# Altium PCB 电眼主板.PcbDoc (part 4 of 5)
Units mm, origin at the board's own origin, x right, y up, seen from the top; angles counter-clockwise.
Board outline 180 x 100 mm, 2 copper layers (Top Layer, Bottom Layer); 210 components, 262 nets, 810 pads, 212 vias.
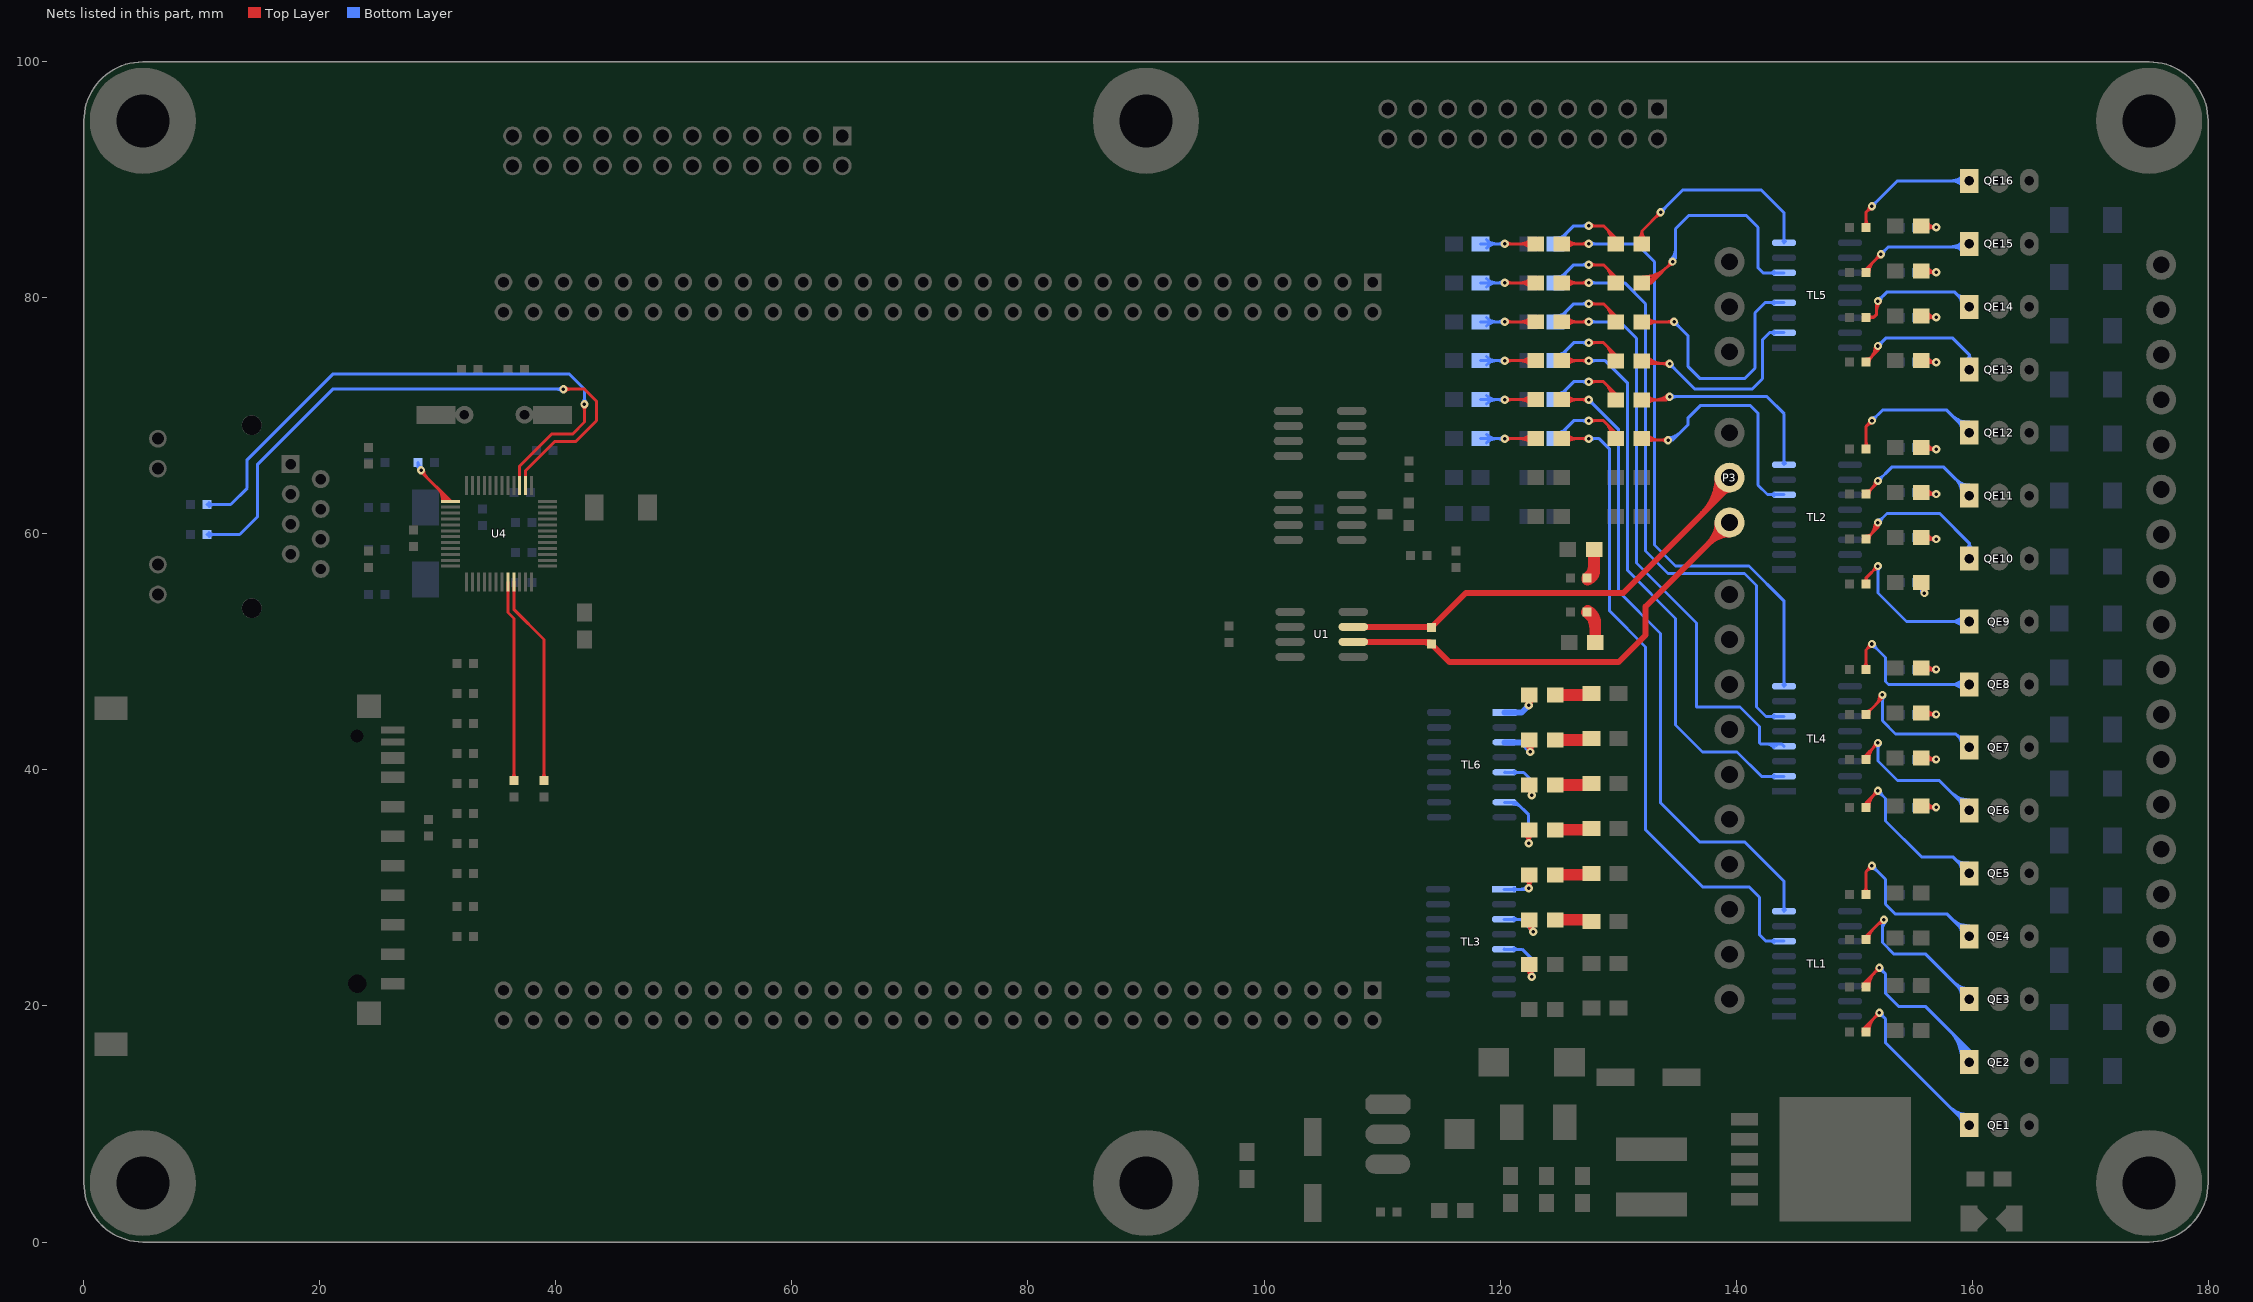
[diagram p4: the nets of this part, all layers, seen from the top]

## Via types
v1: diameter 0.7, hole 0.3, Top Layer to Bottom Layer, 163 vias
v2: diameter 1.4, hole 0.6, Top Layer to Bottom Layer, 49 vias

## Nets (pads, with @x,y where several pads share a name; then routed paths per layer and width w, separated by ;. In a path a pad name is that pad's centre, name@x,y a point inside that pad or via, vN(x,y) a via of type N, cw(c..) or ccw(c..) an arc to the next point about the centre after c; other vN are vias at no path point) (continued)
NetLED10_2: LED10.2 TL3.5 | length 9.1
  Top Layer w0.254: LED10.2@122.256,23.038 cw(c122.083,22.682) v1@122.479,22.682 ; LED10.2@122.479,22.889 ccw(c123.085,22.889) v1@122.66,22.457 ; v1(122.682,22.479) v1@122.479,22.682 ; LED10.2@122.701,23.038 ccw(c122.875,22.682) v1@122.479,22.682 ; v1@122.838,22.638 cw(c123.68,23.495) LED10.2@122.479,23.495 v1@122.479,22.682
  Bottom Layer w0.254: TL3.5@120.377,24.845 TL3.5@120.337,24.805 121.88,24.805 122.682,24.003 v1(122.682,22.479) ; TL3.5@121.181,24.697 cw(c121.442,24.437) 121.442,24.805 cw(c121.442,25.173) TL3.5@121.181,24.913 ; v1@122.524,22.637 ccw(c122.144,23.017) 122.682,23.017 ccw(c123.22,23.017) v1@122.84,22.637
NetLED11_1: LED11.1 TL1.6 | length 59.7
  Top Layer w0.254: LED11.1@125.222,68.072 v1(127.508,68.072) ; LED11.1@125.646,67.713 cw(c126.513,66.846) 126.513,68.072 cw(c126.513,69.298) LED11.1@125.646,68.431 ; v1@127.35,67.914 ccw(c126.97,67.534) 126.97,68.072 ccw(c126.97,68.61) v1@127.35,68.23
  Bottom Layer w0.254: v1(127.508,68.072) 128.397,68.072 129.286,67.183 129.286,53.474 132.334,50.426 132.334,34.925 137.16,30.099 141.097,30.099 141.986,29.21 141.986,26.035 142.534,25.487 TL1.6@144.077,25.487 ; v1@127.666,67.914 cw(c128.046,67.534) 128.046,68.072 cw(c128.046,68.61) v1@127.666,68.23 ; TL1.6@143.233,25.379 ccw(c142.972,25.119) 142.972,25.487 ccw(c142.972,25.855) TL1.6@143.233,25.595
NetLED11_2: LED11.2 RH7.1 | length 10.2
  Top Layer w0.254: v1(120.396,68.072) LED11.2@123.012,68.072 ; v1@120.554,67.914 cw(c120.934,67.534) 120.934,68.072 cw(c120.934,68.61) v1@120.554,68.23 ; LED11.2@122.588,67.713 ccw(c121.721,66.846) 121.721,68.072 ccw(c121.721,69.298) LED11.2@122.588,68.431
  Bottom Layer w0.254: RH7.1@118.364,68.07 v1@120.394,68.07 ; RH7.1@118.85,67.711 cw(c119.717,66.844) 119.717,68.07 cw(c119.717,69.297) RH7.1@118.85,68.43 ; 119.854,68.07 ccw(c119.854,68.614) v1@120.238,68.23 ; 119.862,68.07 cw(c119.862,67.538) v1@120.238,67.914
NetLED12_1: LED12.1 TL2.6 | length 26.3
  Top Layer w0.254: LED12.1@132.021,68.066 132.142,67.945 v1(134.239,67.945) ; LED12.1@132.265,68.246 ccw(c132.992,68.972) 132.992,67.945 ; LED12.1@132.445,67.707 cw(c133.02,67.132) 133.02,67.945 ; LED12.1@132.445,68.425 ccw(c133.605,69.585) 133.605,67.945 ; v1@134.081,67.787 ccw(c133.701,67.407) 133.701,67.945 ccw(c133.701,68.483) v1@134.081,68.103
  Bottom Layer w0.254: v1@134.239,67.914 ccw(c134.239,68.759) 134.836,68.161 ; v1(134.239,67.945) 134.62,67.945 135.946,69.271 135.946,69.85 136.962,70.866 141.224,70.866 141.859,70.231 141.859,64.135 142.661,63.333 TL2.6@144.077,63.333 ; v1@134.239,68.168 ccw(c134.239,69.626) 135.27,68.595 ; TL2.6@143.233,63.225 ccw(c142.972,62.965) 142.972,63.333 ccw(c142.972,63.701) TL2.6@143.233,63.441
NetLED12_2: LED12.2 RH8.1 | length 13.6
  Top Layer w0.254: v1(127.508,69.596) 128.772,69.596 129.811,68.557 LED12.2@129.811,68.066 ; v1@127.666,69.438 cw(c128.046,69.058) 128.046,69.596 cw(c128.046,70.134) v1@127.666,69.754 ; 128.925,69.443 cw(c127.558,68.075) LED12.2@129.492,68.067 ; 129.356,69.012 cw(c128.416,68.072) LED12.2@129.746,68.066
  Bottom Layer w0.254: RH8.1@124.714,68.07 126.24,69.596 v1(127.508,69.596) ; RH8.1@124.841,68.578 ccw(c124.841,69.498) 125.491,68.848 ; RH8.1@125.095,68.07 cw(c126.015,68.07) 125.364,68.721 ; RH8.1@125.349,68.07 cw(c126.882,68.07) 125.798,69.154 ; v1@127.35,69.438 ccw(c126.97,69.058) 126.97,69.596 ccw(c126.97,70.134) v1@127.35,69.754
NetLED13_1: LED13.1 RH9.1 | length 3.7
  Top Layer w1: LED13.1@124.689,27.305 127.633,27.305 RH9.1@127.762,27.176 ; 126.999,27.305 cw(c126.999,26.54) RH9.1@127.54,27.081
NetLED13_2: LED13.2 TL3.3 | length 8.2
  Top Layer w0.254: LED13.2@122.331,26.819 cw(c122.27,26.619) 122.479,26.619 ; LED13.2@122.333,26.843 cw(c122.23,26.616) 122.479,26.616 cw(c122.671,26.616) LED13.2@122.636,26.805 ; LED13.2@122.479,26.838 ccw(c123.164,26.838) v1@122.792,26.263 ; LED13.2@122.627,26.819 ccw(c122.688,26.619) 122.479,26.619 ; v1(122.809,26.289) 122.479,26.619 ; v1@122.93,26.476 cw(c123.465,27.305) LED13.2@122.479,27.305 122.479,26.619
  Bottom Layer w0.254: TL3.3@120.337,27.345 121.753,27.345 v1(122.809,26.289) ; TL3.3@121.181,27.237 cw(c121.442,26.977) 121.442,27.345 cw(c121.442,27.713) TL3.3@121.181,27.453 ; v1@122.586,26.289 ccw(c122.048,26.289) 122.428,26.67 ccw(c122.809,27.05) v1@122.809,26.512
NetLED14_1: LED14.1 TL1.8 | length 58.9
  Top Layer w0.254: LED14.1@125.222,71.374 v1(127.508,71.374) ; LED14.1@125.646,71.015 cw(c126.513,70.148) 126.513,71.374 cw(c126.513,72.6) LED14.1@125.646,71.733 ; v1@127.35,71.216 ccw(c126.97,70.836) 126.97,71.374 ccw(c126.97,71.912) v1@127.35,71.532
  Bottom Layer w0.254: v1@127.508,71.151 cw(c127.508,70.613) 127.889,70.993 cw(c128.269,71.374) v1@127.731,71.374 ; v1(127.508,71.374) 130.048,68.834 130.048,55.118 133.604,51.562 133.604,37.211 136.906,33.909 140.716,33.909 144.077,30.548 TL1.8@144.077,28.027 ; TL1.8@143.969,28.135 ccw(c143.709,28.395) 144.077,28.395 ccw(c144.445,28.395) TL1.8@144.185,28.135
NetLED14_2: LED14.2 RH10.1 | length 10.2
  Top Layer w0.254: v1(120.396,71.374) LED14.2@123.012,71.374 ; v1@120.554,71.216 cw(c120.934,70.836) 120.934,71.374 cw(c120.934,71.912) v1@120.554,71.532 ; LED14.2@122.588,71.015 ccw(c121.721,70.148) 121.721,71.374 ccw(c121.721,72.6) LED14.2@122.588,71.733
  Bottom Layer w0.254: RH10.1@118.364,71.372 v1@120.394,71.372 ; RH10.1@118.85,71.013 cw(c119.717,70.146) 119.717,71.372 cw(c119.717,72.599) RH10.1@118.85,71.732 ; 119.854,71.372 ccw(c119.854,71.916) v1@120.238,71.532 ; 119.862,71.372 cw(c119.862,70.84) v1@120.238,71.216
NetLED15_1: LED15.1 TL2.8 | length 22.2
  Top Layer w0.254: LED15.1@132.021,71.368 134.106,71.368 v1(134.366,71.628) ; LED15.1@132.445,71.009 cw(c133.312,70.142) 133.312,71.368 cw(c133.312,72.595) LED15.1@132.445,71.727 ; 133.2,71.368 ccw(c133.2,72.794) v1@134.208,71.786 ; 133.814,71.368 ccw(c133.814,72.18) v1@134.388,71.606
  Bottom Layer w0.254: v1(134.366,71.628) 142.621,71.628 144.077,70.172 TL2.8@144.077,65.873 ; v1@134.524,71.47 cw(c134.904,71.09) 134.904,71.628 cw(c134.904,72.166) v1@134.524,71.786 ; TL2.8@143.969,65.981 ccw(c143.709,66.241) 144.077,66.241 ccw(c144.445,66.241) TL2.8@144.185,65.981
NetLED15_2: LED15.2 RH11.1 | length 13.6
  Top Layer w0.254: v1(127.508,72.898) 128.772,72.898 129.811,71.859 LED15.2@129.811,71.368 ; v1@127.666,72.74 cw(c128.046,72.36) 128.046,72.898 cw(c128.046,73.436) v1@127.666,73.056 ; 128.925,72.745 cw(c127.558,71.377) LED15.2@129.492,71.369 ; 129.356,72.314 cw(c128.416,71.374) LED15.2@129.746,71.368
  Bottom Layer w0.254: RH11.1@124.714,71.372 126.24,72.898 v1(127.508,72.898) ; RH11.1@124.841,71.88 ccw(c124.841,72.8) 125.491,72.15 ; RH11.1@125.095,71.372 cw(c126.015,71.372) 125.364,72.023 ; RH11.1@125.349,71.372 cw(c126.882,71.372) 125.798,72.456 ; v1@127.35,72.74 ccw(c126.97,72.36) 126.97,72.898 ccw(c126.97,73.436) v1@127.35,73.056
NetLED16_1: LED16.1 RH12.1 | length 3.7
  Top Layer w1: LED16.1@124.689,31.115 127.637,31.115 RH12.1@127.762,31.239 ; RH12.1@127.01,31.115 ccw(c127.01,31.863) RH12.1@127.54,31.334
NetLED16_2: LED16.2 TL3.1 | length 7
  Top Layer w0.254: LED16.2@122.152,30.726 cw(c121.559,30.023) v1@122.479,30.023 ; v1@122.27,30.13 ccw(c121.767,30.633) LED16.2@122.479,30.633 ; v1(122.428,29.972) v1@122.479,30.023 ; 122.479,30.388 ccw(c122.844,30.388) v1@122.586,30.13 ; LED16.2@122.479,31.115 v1@122.479,30.023 ; LED16.2@122.806,30.726 ccw(c123.399,30.023) v1@122.479,30.023
  Bottom Layer w0.254: TL3.1@120.337,29.885 122.341,29.885 v1(122.428,29.972) ; TL3.1@121.181,29.777 cw(c121.442,29.517) 121.442,29.885 cw(c121.442,30.253) TL3.1@121.181,29.993 ; 121.68,29.885 ccw(c121.68,30.72) v1@122.27,30.13
NetLED17_1: LED17.1 RE5.2 | length 7.8
  Top Layer w0.254: LED17.1@155.677,36.957 155.804,36.83 v1(156.947,36.83) cw(c156.947,37.783) LED17.1@156.161,37.244 ; LED17.1@155.951,37.101 ccw(c156.465,37.452) 156.465,36.83 ; LED17.1@156.101,36.598 cw(c156.662,36.037) v1@156.662,36.83 ; v1@156.789,36.672 ccw(c156.408,36.292) 156.408,36.83 ccw(c156.408,37.368) v1@156.789,36.988
  Bottom Layer w0.254: RE5.2@155.321,36.83 v1(156.947,36.83) ; RE5.2@155.501,36.65 cw(c155.934,36.217) 155.934,36.83 cw(c155.934,37.443) RE5.2@155.501,37.01 ; v1@156.789,36.672 ccw(c156.408,36.292) 156.408,36.83 ccw(c156.408,37.368) v1@156.789,36.988
NetLED18_1: LED18.1 RE6.2 | length 7.8
  Top Layer w0.254: LED18.1@155.677,41.021 155.804,40.894 v1(156.947,40.894) cw(c156.947,41.847) LED18.1@156.161,41.308 ; LED18.1@155.951,41.165 ccw(c156.465,41.516) 156.465,40.894 ; LED18.1@156.101,40.662 cw(c156.662,40.101) v1@156.662,40.894 ; v1@156.789,40.736 ccw(c156.408,40.356) 156.408,40.894 ccw(c156.408,41.432) v1@156.789,41.052
  Bottom Layer w0.254: RE6.2@155.321,40.894 v1(156.947,40.894) ; RE6.2@155.501,40.714 cw(c155.934,40.281) 155.934,40.894 cw(c155.934,41.507) RE6.2@155.501,41.074 ; v1@156.789,40.736 ccw(c156.408,40.356) 156.408,40.894 ccw(c156.408,41.432) v1@156.789,41.052
NetLED19_1: LED19.1 RE7.2 | length 7.8
  Top Layer w0.254: LED19.1@155.677,44.831 155.804,44.704 v1(156.947,44.704) cw(c156.947,45.657) LED19.1@156.161,45.118 ; LED19.1@155.951,44.975 ccw(c156.465,45.326) 156.465,44.704 ; LED19.1@156.101,44.472 cw(c156.662,43.911) v1@156.662,44.704 ; v1@156.789,44.546 ccw(c156.408,44.166) 156.408,44.704 ccw(c156.408,45.242) v1@156.789,44.862
  Bottom Layer w0.254: RE7.2@155.321,44.704 v1(156.947,44.704) ; RE7.2@155.501,44.524 cw(c155.934,44.091) 155.934,44.704 cw(c155.934,45.317) RE7.2@155.501,44.884 ; v1@156.789,44.546 ccw(c156.408,44.166) 156.408,44.704 ccw(c156.408,45.242) v1@156.789,44.862
NetLED20_1: LED20.1 RE8.2 | length 7.8
  Top Layer w0.254: LED20.1@155.677,48.641 155.804,48.514 v1(156.947,48.514) cw(c156.947,49.467) LED20.1@156.161,48.928 ; LED20.1@155.951,48.785 ccw(c156.465,49.136) 156.465,48.514 ; LED20.1@156.101,48.282 cw(c156.662,47.721) v1@156.662,48.514 ; v1@156.789,48.356 ccw(c156.408,47.976) 156.408,48.514 ccw(c156.408,49.052) v1@156.789,48.672
  Bottom Layer w0.254: RE8.2@155.321,48.514 v1(156.947,48.514) ; RE8.2@155.501,48.334 cw(c155.934,47.901) 155.934,48.514 cw(c155.934,49.127) RE8.2@155.501,48.694 ; v1@156.789,48.356 ccw(c156.408,47.976) 156.408,48.514 ccw(c156.408,49.052) v1@156.789,48.672
NetLED21_1: LED21.1 RH13.1 | length 3.7
  Top Layer w1: LED21.1@124.689,34.925 127.637,34.925 RH13.1@127.762,35.05 ; RH13.1@127.006,34.925 ccw(c127.006,35.679) RH13.1@127.54,35.146
NetLED21_2: LED21.2 TL6.7 | length 10.2
  Top Layer w0.254: LED21.2@122.081,34.541 cw(c121.424,33.782) v1(122.428,33.782) ; v1@122.27,33.94 ccw(c121.89,34.32) 122.428,34.32 ccw(c122.966,34.32) v1@122.586,33.94 ; LED21.2@122.479,34.925 122.428,34.874 v1(122.428,33.782) ; LED21.2@122.762,34.555 ccw(c123.49,33.782) v1(122.428,33.782)
  Bottom Layer w0.254: TL6.7@120.396,37.251 121.372,37.251 122.428,36.195 v1(122.428,33.782) ; TL6.7@121.133,37.099 cw(c121.133,36.153) 121.801,36.822 ; v1@122.27,33.94 ccw(c121.89,34.32) 122.428,34.32 ccw(c122.966,34.32) v1@122.586,33.94
NetLED22_1: LED22.1 TL4.2 | length 52.2
  Top Layer w0.254: LED22.1@125.222,74.676 v1(127.508,74.676) ; LED22.1@125.646,74.317 cw(c126.513,73.45) 126.513,74.676 cw(c126.513,75.902) LED22.1@125.646,75.035 ; v1@127.35,74.518 ccw(c126.97,74.138) 126.97,74.676 ccw(c126.97,75.214) v1@127.35,74.834
  Bottom Layer w0.254: v1(127.508,74.676) 128.905,74.676 130.81,72.771 130.81,56.896 134.874,52.832 134.874,43.815 137.16,41.529 140.081,41.529 142.153,39.457 TL4.2@144.077,39.457 ; v1@127.666,74.518 cw(c128.046,74.138) 128.046,74.676 cw(c128.046,75.214) v1@127.666,74.834 ; TL4.2@143.233,39.349 ccw(c142.972,39.089) 142.972,39.457 ccw(c142.972,39.825) TL4.2@143.233,39.565
NetLED22_2: LED22.2 RH14.1 | length 10.2
  Top Layer w0.254: v1(120.396,74.676) LED22.2@123.012,74.676 ; v1@120.554,74.518 cw(c120.934,74.138) 120.934,74.676 cw(c120.934,75.214) v1@120.554,74.834 ; LED22.2@122.588,74.317 ccw(c121.721,73.45) 121.721,74.676 ccw(c121.721,75.902) LED22.2@122.588,75.035
  Bottom Layer w0.254: RH14.1@118.364,74.674 v1@120.394,74.674 ; RH14.1@118.85,74.315 cw(c119.717,73.448) 119.717,74.674 cw(c119.717,75.901) RH14.1@118.85,75.034 ; 119.854,74.674 ccw(c119.854,75.218) v1@120.238,74.834 ; 119.862,74.674 cw(c119.862,74.142) v1@120.238,74.518
NetLED23_1: LED23.1 TL5.2 | length 23
  Top Layer w0.254: LED23.1@132.021,74.67 132.269,74.422 v1(134.366,74.422) ; LED23.1@132.086,74.67 ccw(c132.685,75.269) LED23.1@132.685,74.422 ; LED23.1@132.265,74.85 ccw(c133.298,75.883) 133.298,74.422 ; LED23.1@132.445,74.311 cw(c132.713,74.043) LED23.1@132.713,74.422 ; LED23.1@132.445,75.029 ccw(c133.911,76.496) 133.911,74.422 ; v1@134.208,74.264 ccw(c133.828,73.884) 133.828,74.422 ccw(c133.828,74.96) v1@134.208,74.58
  Bottom Layer w0.254: v1@134.366,74.199 cw(c134.366,73.661) 134.747,74.041 cw(c135.127,74.422) v1@134.589,74.422 ; v1(134.366,74.422) 136.525,72.263 141.351,72.263 142.24,73.152 142.24,76.454 142.835,77.049 TL5.2@144.077,77.049 ; TL5.2@143.233,76.941 ccw(c142.972,76.681) 142.972,77.049 ccw(c142.972,77.417) TL5.2@143.233,77.157
NetLED23_2: LED23.2 RH15.1 | length 13.6
  Top Layer w0.254: v1(127.508,76.2) 128.772,76.2 129.811,75.161 LED23.2@129.811,74.67 ; v1@127.666,76.042 cw(c128.046,75.662) 128.046,76.2 cw(c128.046,76.738) v1@127.666,76.358 ; 128.925,76.047 cw(c127.558,74.679) LED23.2@129.492,74.671 ; 129.356,75.616 cw(c128.416,74.676) LED23.2@129.746,74.67
  Bottom Layer w0.254: RH15.1@124.714,74.674 126.24,76.2 v1(127.508,76.2) ; RH15.1@124.841,75.182 ccw(c124.841,76.102) 125.491,75.452 ; RH15.1@125.095,74.674 cw(c126.015,74.674) 125.364,75.325 ; RH15.1@125.349,74.674 cw(c126.882,74.674) 125.798,75.758 ; v1@127.35,76.042 ccw(c126.97,75.662) 126.97,76.2 ccw(c126.97,76.738) v1@127.35,76.358
NetLED24_1: LED24.1 RH16.1 | length 3.7
  Top Layer w1: LED24.1@124.689,38.735 127.637,38.735 RH16.1@127.762,38.86 ; RH16.1@127.006,38.735 ccw(c127.006,39.489) RH16.1@127.54,38.956
NetLED24_2: LED24.2 TL6.5 | length 8.4
  Top Layer w0.254: LED24.2@122.358,38.262 cw(c122.244,37.973) v1@122.555,37.973 ; LED24.2@122.479,38.735 LED24.2@122.555,38.659 ; v1(122.682,37.846) v1@122.555,37.973 ; LED24.2@122.749,38.27 ccw(c122.88,37.973) v1@122.555,37.973 ; v1@122.835,38.008 cw(c123.451,38.659) LED24.2@122.555,38.659 ; v1@122.555,37.973 LED24.2@122.555,38.659
  Bottom Layer w0.254: TL6.5@120.436,39.831 TL6.5@120.396,39.791 122.007,39.791 122.479,39.319 122.479,37.998 122.631,37.846 v1(122.682,37.846) ; TL6.5@121.24,39.683 cw(c121.501,39.423) 121.501,39.791 cw(c121.501,40.159) TL6.5@121.24,39.899 ; 122.479,38.262 ccw(c123.098,38.262) v1@122.66,37.824 ; 122.479,38.875 ccw(c123.711,38.875) v1@122.84,38.004
NetLED25_1: LED25.1 TL4.4 | length 54.7
  Top Layer w0.254: LED25.1@125.222,77.978 v1(127.508,77.978) ; LED25.1@125.646,77.619 cw(c126.513,76.752) 126.513,77.978 cw(c126.513,79.204) LED25.1@125.646,78.337 ; v1@127.35,77.82 ccw(c126.97,77.44) 126.97,77.978 ccw(c126.97,78.516) v1@127.35,78.136
  Bottom Layer w0.254: v1(127.508,77.978) 130.169,77.978 131.572,76.575 131.572,57.531 136.652,52.451 136.652,45.339 140.335,45.339 141.986,43.688 141.986,42.291 142.075,42.202 143.872,42.202 TL4.4@144.077,41.997 ; v1@127.666,77.82 cw(c128.046,77.44) 128.046,77.978 cw(c128.046,78.516) v1@127.666,78.136 ; 142.477,42.202 cw(c142.477,41.134) TL4.4@143.233,41.889 ; 143.09,42.202 cw(c143.09,41.747) TL4.4@143.412,42.069
NetLED25_2: LED25.2 RH17.1 | length 10.2
  Top Layer w0.254: v1(120.396,77.978) LED25.2@123.012,77.978 ; v1@120.554,77.82 cw(c120.934,77.44) 120.934,77.978 cw(c120.934,78.516) v1@120.554,78.136 ; LED25.2@122.588,77.619 ccw(c121.721,76.752) 121.721,77.978 ccw(c121.721,79.204) LED25.2@122.588,78.337
  Bottom Layer w0.254: RH17.1@118.364,77.976 v1@120.394,77.976 ; RH17.1@118.85,77.617 cw(c119.717,76.75) 119.717,77.976 cw(c119.717,79.203) RH17.1@118.85,78.336 ; 119.854,77.976 ccw(c119.854,78.52) v1@120.238,78.136 ; 119.862,77.976 cw(c119.862,77.444) v1@120.238,77.82
NetLED26_1: LED26.1 TL5.4 | length 25.2
  Top Layer w0.254: LED26.1@132.021,77.972 134.741,77.972 v1(134.747,77.978) ; LED26.1@132.445,77.613 cw(c133.312,76.746) 133.312,77.972 cw(c133.312,79.199) LED26.1@132.445,78.331 ; 134.195,77.972 ccw(c134.195,78.53) v1@134.589,78.136 ; 134.223,77.972 cw(c134.223,77.454) v1@134.589,77.82
  Bottom Layer w0.254: v1@134.747,77.755 cw(c134.747,77.217) 135.128,77.597 cw(c135.508,77.978) v1@134.97,77.978 ; v1(134.747,77.978) 135.946,76.779 135.946,74.168 136.962,73.152 140.716,73.152 141.605,74.041 141.605,78.74 142.454,79.589 TL5.4@144.077,79.589 ; TL5.4@143.233,79.481 ccw(c142.972,79.221) 142.972,79.589 ccw(c142.972,79.957) TL5.4@143.233,79.697
NetLED26_2: LED26.2 RH18.1 | length 13.6
  Top Layer w0.254: v1(127.508,79.502) 128.772,79.502 129.811,78.463 LED26.2@129.811,77.972 ; v1@127.666,79.344 cw(c128.046,78.964) 128.046,79.502 cw(c128.046,80.04) v1@127.666,79.66 ; 128.925,79.349 cw(c127.558,77.981) LED26.2@129.492,77.973 ; 129.356,78.918 cw(c128.416,77.978) LED26.2@129.746,77.972
  Bottom Layer w0.254: RH18.1@124.714,77.976 126.24,79.502 v1(127.508,79.502) ; RH18.1@124.841,78.484 ccw(c124.841,79.404) 125.491,78.754 ; RH18.1@125.095,77.976 cw(c126.015,77.976) 125.364,78.627 ; RH18.1@125.349,77.976 cw(c126.882,77.976) 125.798,79.06 ; v1@127.35,79.344 ccw(c126.97,78.964) 126.97,79.502 ccw(c126.97,80.04) v1@127.35,79.66
NetLED27_1: LED27.1 RH19.1 | length 3.7
  Top Layer w1: LED27.1@124.689,42.545 127.637,42.545 RH19.1@127.762,42.67 ; RH19.1@127.006,42.545 ccw(c127.006,43.299) RH19.1@127.54,42.766
NetLED27_2: LED27.2 TL6.3 | length 5.5
  Top Layer w0.508: LED27.2@122.274,42.276 cw(c121.597,41.598) v1@122.555,41.598 ; LED27.2@122.479,42.545 122.555,42.469 v1(122.555,41.529) ; v1@122.555,41.652 cw(c123.437,41.652) LED27.2@122.813,42.276
  Bottom Layer w0.508: TL6.3@120.396,42.331 121.88,42.331 122.555,41.656 v1(122.555,41.529) ; 122.301,41.91 cw(c121.921,41.529) v1@122.459,41.529
NetLED28_1: LED28.1 TL4.6 | length 56.6
  Top Layer w0.254: LED28.1@125.222,81.28 v1(127.508,81.28) ; LED28.1@125.646,80.921 cw(c126.513,80.054) 126.513,81.28 cw(c126.513,82.506) LED28.1@125.646,81.639 ; v1@127.35,81.122 ccw(c126.97,80.742) 126.97,81.28 ccw(c126.97,81.818) v1@127.35,81.438
  Bottom Layer w0.254: v1(127.508,81.28) 130.556,81.28 132.334,79.502 132.334,58.547 134.239,56.642 140.716,56.642 141.732,55.626 141.732,45.339 142.534,44.537 TL4.6@144.077,44.537 ; v1@127.666,81.122 cw(c128.046,80.742) 128.046,81.28 cw(c128.046,81.818) v1@127.666,81.438 ; TL4.6@143.233,44.429 ccw(c142.972,44.169) 142.972,44.537 ccw(c142.972,44.905) TL4.6@143.233,44.645
NetLED28_2: LED28.2 RH20.1 | length 10.2
  Top Layer w0.254: v1(120.396,81.28) LED28.2@123.012,81.28 ; v1@120.554,81.122 cw(c120.934,80.742) 120.934,81.28 cw(c120.934,81.818) v1@120.554,81.438 ; LED28.2@122.588,80.921 ccw(c121.721,80.054) 121.721,81.28 ccw(c121.721,82.506) LED28.2@122.588,81.639
  Bottom Layer w0.254: RH20.1@118.364,81.278 v1@120.394,81.278 ; RH20.1@118.85,80.919 cw(c119.717,80.052) 119.717,81.278 cw(c119.717,82.505) RH20.1@118.85,81.638 ; 119.854,81.278 ccw(c119.854,81.822) v1@120.238,81.438 ; 119.862,81.278 cw(c119.862,80.746) v1@120.238,81.122
NetLED29_1: LED29.1 TL5.6 | length 30.3
  Top Layer w0.254: LED29.1@132.021,81.274 132.82,81.274 ; LED29.1@132.086,81.02 ccw(c132.086,82.18) 132.906,81.36 ; LED29.1@132.086,81.274 ccw(c132.086,83.047) 133.339,81.793 ; LED29.1@132.086,81.528 ccw(c132.086,83.914) 133.773,82.227 ; LED29.1@132.086,81.782 ccw(c132.086,84.782) 134.207,82.661 ; LED29.1@132.561,81.095 cw(c132.82,80.997) 132.82,81.274 ; LED29.1@132.561,81.453 ccw(c132.82,81.551) 132.82,81.274 ; v1@134.397,83.074 cw(c133.859,83.074) 134.239,82.693 cw(c134.62,82.313) v1@134.62,82.851 ; v1(134.62,83.074) 132.82,81.274
  Bottom Layer w0.254: v1@134.462,83.232 ccw(c133.468,84.226) 134.874,84.226 ; v1(134.62,83.074) 134.874,83.328 134.874,85.852 136.017,86.995 140.843,86.995 141.859,85.979 141.859,82.55 142.28,82.129 TL5.6@144.077,82.129 ; v1@134.642,83.052 ccw(c134.082,83.612) 134.874,83.612 ; TL5.6@143.233,82.021 ccw(c142.972,81.761) 142.972,82.129 ccw(c142.972,82.497) TL5.6@143.233,82.237
NetLED29_2: LED29.2 RH21.1 | length 13.6
  Top Layer w0.254: v1(127.508,82.804) 128.772,82.804 129.811,81.765 LED29.2@129.811,81.274 ; v1@127.666,82.646 cw(c128.046,82.266) 128.046,82.804 cw(c128.046,83.342) v1@127.666,82.962 ; 128.925,82.651 cw(c127.558,81.283) LED29.2@129.492,81.275 ; 129.356,82.22 cw(c128.416,81.28) LED29.2@129.746,81.274
  Bottom Layer w0.254: RH21.1@124.714,81.278 126.24,82.804 v1(127.508,82.804) ; RH21.1@124.841,81.786 ccw(c124.841,82.706) 125.491,82.056 ; RH21.1@125.095,81.278 cw(c126.015,81.278) 125.364,81.929 ; RH21.1@125.349,81.278 cw(c126.882,81.278) 125.798,82.362 ; v1@127.35,82.646 ccw(c126.97,82.266) 126.97,82.804 ccw(c126.97,83.342) v1@127.35,82.962
NetLED30_1: LED30.1 RH22.1 | length 3.7
  Top Layer w1: LED30.1@124.689,46.355 127.637,46.355 RH22.1@127.762,46.48 ; RH22.1@127.006,46.355 ccw(c127.006,47.109) RH22.1@127.54,46.576
NetLED30_2: LED30.2 TL6.1 | length 4.8
  Top Layer w0.508: LED30.2@122.228,46.068 cw(c121.747,45.517) v1@122.479,45.517 ; v1@122.36,45.534 ccw(c122.074,45.82) LED30.2@122.479,45.82 ; v1(122.428,45.466) v1@122.479,45.517 ; LED30.2@122.479,46.355 v1@122.479,45.517 ; LED30.2@122.729,46.068 ccw(c123.21,45.517) v1@122.479,45.517
  Bottom Layer w0.508: TL6.1@120.396,44.871 121.833,44.871 v1(122.428,45.466)
NetLED31_1: LED31.1 TL4.8 | length 56.9
  Top Layer w0.254: LED31.1@125.222,84.582 v1(127.508,84.582) ; LED31.1@125.646,84.223 cw(c126.513,83.356) 126.513,84.582 cw(c126.513,85.808) LED31.1@125.646,84.941 ; v1@127.35,84.424 ccw(c126.97,84.044) 126.97,84.582 ccw(c126.97,85.12) v1@127.35,84.74
  Bottom Layer w0.254: v1(127.508,84.582) 131.572,84.582 133.096,83.058 133.096,59.055 134.874,57.277 141.097,57.277 144.077,54.297 TL4.8@144.077,47.077 ; v1@127.666,84.424 cw(c128.046,84.044) 128.046,84.582 cw(c128.046,85.12) v1@127.666,84.74 ; TL4.8@143.969,47.185 ccw(c143.709,47.445) 144.077,47.445 ccw(c144.445,47.445) TL4.8@144.185,47.185
NetLED31_2: LED31.2 RH23.1 | length 10.2
  Top Layer w0.254: v1(120.396,84.582) LED31.2@123.012,84.582 ; v1@120.554,84.424 cw(c120.934,84.044) 120.934,84.582 cw(c120.934,85.12) v1@120.554,84.74 ; LED31.2@122.588,84.223 ccw(c121.721,83.356) 121.721,84.582 ccw(c121.721,85.808) LED31.2@122.588,84.941
  Bottom Layer w0.254: RH23.1@118.364,84.58 120.394,84.58 v1(120.396,84.582) ; RH23.1@118.85,84.221 cw(c119.717,83.354) 119.717,84.58 cw(c119.717,85.807) RH23.1@118.85,84.94 ; 119.854,84.58 ccw(c119.854,85.124) v1@120.238,84.74 ; 119.862,84.58 cw(c119.862,84.048) v1@120.238,84.424
NetLED32_1: LED32.1 TL5.8 | length 21.8
  Top Layer w0.254: LED32.1@131.694,84.965 ccw(c131.106,85.666) 132.021,85.666 ; LED32.1@132.021,84.576 132.021,85.666 ; LED32.1@132.347,84.965 cw(c132.935,85.666) 132.021,85.666 ; v1@133.381,87.249 cw(c132.843,87.249) 133.223,86.868 cw(c133.604,86.488) v1@133.604,87.026 ; v1(133.604,87.249) 132.021,85.666
  Bottom Layer w0.254: v1(133.604,87.249) 135.509,89.154 142.113,89.154 144.077,87.19 TL5.8@144.077,84.669 ; v1@133.604,87.472 ccw(c133.604,88.01) 133.985,87.63 ccw(c134.365,87.249) v1@133.827,87.249 ; TL5.8@143.969,84.777 ccw(c143.709,85.037) 144.077,85.037 ccw(c144.445,85.037) TL5.8@144.185,84.777
NetLED32_2: LED32.2 RH24.1 | length 13.6
  Top Layer w0.254: v1(127.508,86.106) 128.772,86.106 129.811,85.067 LED32.2@129.811,84.576 ; v1@127.666,85.948 cw(c128.046,85.568) 128.046,86.106 cw(c128.046,86.644) v1@127.666,86.264 ; 128.925,85.953 cw(c127.558,84.585) LED32.2@129.492,84.577 ; 129.356,85.522 cw(c128.416,84.582) LED32.2@129.746,84.576
  Bottom Layer w0.254: RH24.1@124.714,84.58 126.24,86.106 v1(127.508,86.106) ; RH24.1@124.841,85.088 ccw(c124.841,86.008) 125.491,85.358 ; RH24.1@125.095,84.58 cw(c126.015,84.58) 125.364,85.231 ; RH24.1@125.349,84.58 cw(c126.882,84.58) 125.798,85.664 ; v1@127.35,85.948 ccw(c126.97,85.568) 126.97,86.106 ccw(c126.97,86.644) v1@127.35,86.264
NetLED33_1: LED33.1 RE9.2 | length 6.3
  Top Layer w0.254: LED33.1@155.635,55.389 cw(c155.523,54.971) v1@155.956,54.971 ; LED33.1@155.702,55.88 155.956,55.626 v1(155.956,54.991) ; v1@155.798,55.149 ccw(c155.418,55.529) 155.956,55.529 ccw(c156.494,55.529) v1@156.114,55.149 ; v1@155.956,55.11 cw(c156.537,55.11) LED33.1@156.126,55.521
  Bottom Layer w0.254: RE9.2@155.321,55.626 cw(c155.321,55.013) 155.755,55.446 cw(c156.188,55.88) RE9.2@155.575,55.88 ; RE9.2@155.321,55.88 155.956,55.245 v1(155.956,54.991) ; RE9.2@155.396,55.805 cw(c154.581,54.991) v1@155.733,54.991 ; 155.829,55.372 cw(c155.449,54.991) v1@155.987,54.991
NetLED34_1: LED34.1 RE10.2 | length 7.6
  Top Layer w0.254: LED34.1@155.702,59.69 155.829,59.563 v1(156.972,59.563) cw(c156.972,60.516) LED34.1@156.186,59.977 ; LED34.1@155.977,59.834 ccw(c156.49,60.185) 156.49,59.563 ; LED34.1@156.126,59.331 cw(c156.687,58.77) v1@156.687,59.563 ; v1@156.814,59.405 ccw(c156.434,59.025) 156.434,59.563 ccw(c156.434,60.101) v1@156.814,59.721
  Bottom Layer w0.254: RE10.2@155.346,59.563 v1(156.972,59.563) ; RE10.2@155.501,59.87 ccw(c156.241,60.61) 156.241,59.563 ; v1@156.814,59.405 ccw(c156.434,59.025) 156.434,59.563 ccw(c156.434,60.101) v1@156.814,59.721
NetLED35_1: LED35.1 RE11.2 | length 7.6
  Top Layer w0.254: LED35.1@155.702,63.5 155.829,63.373 v1(156.972,63.373) cw(c156.972,64.326) LED35.1@156.186,63.787 ; LED35.1@155.977,63.644 ccw(c156.49,63.995) 156.49,63.373 ; LED35.1@156.126,63.141 cw(c156.687,62.58) v1@156.687,63.373 ; v1@156.814,63.215 ccw(c156.434,62.835) 156.434,63.373 ccw(c156.434,63.911) v1@156.814,63.531
  Bottom Layer w0.254: RE11.2@155.346,63.373 v1(156.972,63.373) ; RE11.2@155.501,63.68 ccw(c156.241,64.42) 156.241,63.373 ; v1@156.814,63.215 ccw(c156.434,62.835) 156.434,63.373 ccw(c156.434,63.911) v1@156.814,63.531
NetLED36_1: LED36.1 RE12.2 | length 7.6
  Top Layer w0.254: LED36.1@155.702,67.31 155.829,67.183 v1(156.972,67.183) cw(c156.972,68.136) LED36.1@156.186,67.597 ; LED36.1@155.977,67.454 ccw(c156.49,67.805) 156.49,67.183 ; LED36.1@156.126,66.951 cw(c156.687,66.39) v1@156.687,67.183 ; v1@156.814,67.025 ccw(c156.434,66.645) 156.434,67.183 ccw(c156.434,67.721) v1@156.814,67.341
  Bottom Layer w0.254: RE12.2@155.346,67.183 v1(156.972,67.183) ; RE12.2@155.501,67.49 ccw(c156.241,68.23) 156.241,67.183 ; v1@156.814,67.025 ccw(c156.434,66.645) 156.434,67.183 ccw(c156.434,67.721) v1@156.814,67.341
NetLED37_1: LED37.1 RE13.2 | length 7.8
  Top Layer w0.254: LED37.1@155.702,74.676 155.829,74.549 v1(156.972,74.549) cw(c156.972,75.502) LED37.1@156.186,74.963 ; LED37.1@155.977,74.82 ccw(c156.49,75.171) 156.49,74.549 ; LED37.1@156.126,74.317 cw(c156.687,73.756) v1@156.687,74.549 ; v1@156.814,74.391 ccw(c156.434,74.011) 156.434,74.549 ccw(c156.434,75.087) v1@156.814,74.707
  Bottom Layer w0.254: RE13.2@155.346,74.549 v1(156.972,74.549) ; RE13.2@155.526,74.369 cw(c155.959,73.936) 155.959,74.549 cw(c155.959,75.162) RE13.2@155.526,74.729 ; v1@156.814,74.391 ccw(c156.434,74.011) 156.434,74.549 ccw(c156.434,75.087) v1@156.814,74.707
NetLED38_1: LED38.1 RE14.2 | length 7.8
  Top Layer w0.254: LED38.1@155.702,78.486 155.829,78.359 v1(156.972,78.359) cw(c156.972,79.312) LED38.1@156.186,78.773 ; LED38.1@155.977,78.63 ccw(c156.49,78.981) 156.49,78.359 ; LED38.1@156.126,78.127 cw(c156.687,77.566) v1@156.687,78.359 ; v1@156.814,78.201 ccw(c156.434,77.821) 156.434,78.359 ccw(c156.434,78.897) v1@156.814,78.517
  Bottom Layer w0.254: RE14.2@155.346,78.359 v1(156.972,78.359) ; RE14.2@155.526,78.179 cw(c155.959,77.746) 155.959,78.359 cw(c155.959,78.972) RE14.2@155.526,78.539 ; v1@156.814,78.201 ccw(c156.434,77.821) 156.434,78.359 ccw(c156.434,78.897) v1@156.814,78.517
NetLED39_1: LED39.1 RE15.2 | length 7.8
  Top Layer w0.254: LED39.1@155.702,82.296 155.829,82.169 v1(156.972,82.169) cw(c156.972,83.122) LED39.1@156.186,82.583 ; LED39.1@155.977,82.44 ccw(c156.49,82.791) 156.49,82.169 ; LED39.1@156.126,81.937 cw(c156.687,81.376) v1@156.687,82.169 ; v1@156.814,82.011 ccw(c156.434,81.631) 156.434,82.169 ccw(c156.434,82.707) v1@156.814,82.327
  Bottom Layer w0.254: RE15.2@155.346,82.169 v1(156.972,82.169) ; RE15.2@155.526,81.989 cw(c155.959,81.556) 155.959,82.169 cw(c155.959,82.782) RE15.2@155.526,82.349 ; v1@156.814,82.011 ccw(c156.434,81.631) 156.434,82.169 ccw(c156.434,82.707) v1@156.814,82.327
NetLED40_1: LED40.1 RE16.2 | length 7.8
  Top Layer w0.254: LED40.1@155.702,86.106 155.829,85.979 v1(156.972,85.979) cw(c156.972,86.932) LED40.1@156.186,86.393 ; LED40.1@155.977,86.25 ccw(c156.49,86.601) 156.49,85.979 ; LED40.1@156.126,85.747 cw(c156.687,85.186) v1@156.687,85.979 ; v1@156.814,85.821 ccw(c156.434,85.441) 156.434,85.979 ccw(c156.434,86.517) v1@156.814,86.137
  Bottom Layer w0.254: RE16.2@155.346,85.979 v1(156.972,85.979) ; RE16.2@155.526,85.799 cw(c155.959,85.366) 155.959,85.979 cw(c155.959,86.592) RE16.2@155.526,86.159 ; v1@156.814,85.821 ccw(c156.434,85.441) 156.434,85.979 ccw(c156.434,86.517) v1@156.814,86.137
NetLED41_2: LED41.2 R31.2 | length 5.8
  Top Layer w1: R31.2@127.371,53.371 128.067,52.675 LED41.2@128.067,50.8 ; R31.2@127.429,53.475 cw(c126.82,52.387) 128.067,52.387 ; R31.2@127.455,53.455 cw(c125.978,51.978) 128.067,51.978
NetLED42_2: LED42.2 R32.2 | length 5
  Top Layer w1: R32.2@127.381,56.261 127.965,56.845 ; R32.2@127.408,56.145 ccw(c127.247,56.845) 127.965,56.845 ; R32.2@127.465,56.177 ccw(c126.258,57.384) 127.965,57.384 ; LED42.2@127.965,58.674 127.965,56.845
NetP3_1: P3.1 R17.2 U1.6 | length 43.5
  Top Layer w0.508: U1.6@107.568,50.851 114.008,50.851 R17.2@114.186,50.673 115.71,49.149 130.048,49.149 132.334,51.435 132.334,53.848 P3.1@139.446,60.96 ; 113.45,50.851 cw(c113.45,49.937) R17.2@114.096,50.583 ; P3.1@138.43,60.96 cw(c135.977,60.96) 137.712,59.226 cw(c139.446,57.491) P3.1@139.446,59.944
NetP3_2: P3.2 R17.1 U1.7 | length 45.7
  Top Layer w0.254: R17.1@114.135,52.121 R17.1@114.186,52.07
  Top Layer w0.508: U1.7@107.568,52.121 R17.1@114.135,52.121 ; 113.757,52.121 cw(c113.757,51.641) R17.1@114.096,51.98 ; R17.1@114.186,52.07 117.107,54.991 130.429,54.991 139.446,64.008 P3.2@139.446,64.77 cw(c137.606,64.77) 138.907,63.469 ; 137.173,61.735 ccw(c134.138,64.77) P3.2@138.43,64.77 ; 138.04,62.602 ccw(c135.872,64.77) P3.2@138.938,64.77 ; 139.012,63.574 cw(c139.446,63.141) P3.2@139.446,63.754
NetQE1_1: QE1.1 R1.2 | length 25.1
  Top Layer w0.254: R1.2@150.749,17.78 cw(c151.362,17.78) 150.929,18.214 ; R1.2@150.851,17.983 ccw(c150.622,18.288) 151.003,18.288 ; R1.2@151.155,17.983 cw(c151.384,18.288) 151.003,18.288 ; R1.2@151.257,17.78 cw(c153.097,17.78) 151.796,19.081 ; 151.362,18.647 ccw(c152.229,17.78) R1.2@151.003,17.78 151.003,18.288 ; v1@151.923,19.431 cw(c151.385,19.431) 151.765,19.05 cw(c152.146,18.67) v1@152.146,19.208 ; v1(152.146,19.431) 151.003,18.288
  Bottom Layer w0.254: v1@152.146,19.208 cw(c152.146,18.67) 152.527,19.05 cw(c152.907,19.431) v1@152.369,19.431 ; v1(152.146,19.431) 152.667,18.91 152.667,16.878 159.639,9.906 QE1.1@159.766,9.906 ; 158.032,11.513 ccw(c159.766,13.248) QE1.1@159.766,10.795 ; 158.465,11.08 ccw(c159.766,12.381) QE1.1@159.766,10.541 ; 158.89,10.655 cw(c158.37,10.135) QE1.1@159.106,10.135 ; 158.899,10.646 ccw(c159.766,11.513) QE1.1@159.766,10.287
NetQE2_1: QE2.1 R2.2 | length 28
  Top Layer w0.254: R2.2@150.749,21.59 cw(c151.362,21.59) 150.929,22.024 ; R2.2@150.851,21.793 ccw(c150.622,22.098) 151.003,22.098 ; R2.2@151.155,21.793 cw(c151.384,22.098) 151.003,22.098 ; R2.2@151.257,21.59 cw(c153.097,21.59) 151.796,22.891 ; 151.362,22.457 ccw(c152.229,21.59) R2.2@151.003,21.59 151.003,22.098 ; v1@151.923,23.241 cw(c151.385,23.241) 151.765,22.86 cw(c152.146,22.48) v1@152.146,23.018 ; v1(152.146,23.241) 151.003,22.098
  Bottom Layer w0.254: v1@152.146,23.018 cw(c152.146,22.48) 152.527,22.86 cw(c152.907,23.241) v1@152.369,23.241 ; v1(152.146,23.241) 152.667,22.72 152.667,21.069 153.797,19.939 156.083,19.939 159.766,16.256 QE2.1@159.766,15.24 ; 158.082,17.94 cw(c155.61,15.469) QE2.1@159.106,15.469 ; 158.515,17.507 cw(c156.478,15.469) QE2.1@159.36,15.469 ; 158.949,17.073 cw(c157.345,15.469) QE2.1@159.614,15.469 ; 159.383,16.639 cw(c158.212,15.469) QE2.1@159.868,15.469
NetQE3_1: QE3.1 R3.2 | length 20.7
  Top Layer w0.254: 151.183,26.088 ccw(c151.616,25.654) R3.2@151.003,25.654 151.003,25.908 152.4,27.305 v1(152.527,27.305) ; R3.2@151.257,25.654 cw(c152.483,25.654) 151.616,26.521 ; 151.93,26.835 cw(c152.527,26.237) v1@152.527,27.082
  Bottom Layer w0.254: 152.4,26.46 cw(c153.372,26.46) v1@152.685,27.147 ; v1(152.527,27.305) 152.4,27.178 152.4,25.375 153.391,24.384 156.083,24.384 159.766,20.701 QE3.1@159.766,20.574 ; 158.465,22.002 ccw(c159.766,23.303) QE3.1@159.766,21.463 ; 158.71,21.757 cw(c157.757,20.803) QE3.1@159.106,20.803 ; 158.899,21.568 ccw(c159.766,22.435) QE3.1@159.766,21.209 ; QE3.1@159.144,21.323 cw(c158.624,20.803) QE3.1@159.36,20.803
NetQE4_1: QE4.1 R4.2 | length 20.9
  Top Layer w0.254: R4.2@150.823,29.644 ccw(c150.39,30.077) 151.003,30.077 ccw(c151.616,30.077) R4.2@151.183,29.644 ; R4.2@151.003,29.464 151.003,31.369 v1(151.511,31.877) ; v1@151.288,31.877 cw(c150.75,31.877) 151.13,31.496 cw(c151.511,31.116) v1@151.511,31.654
  Bottom Layer w0.254: v1@151.511,31.654 cw(c151.511,31.116) 151.892,31.496 cw(c152.272,31.877) v1@151.734,31.877 ; v1(151.511,31.877) 152.654,30.734 152.654,28.626 153.467,27.813 157.861,27.813 QE4.1@159.766,25.908 ; 158.248,27.426 ccw(c159.766,28.943) QE4.1@159.766,26.797 ; 158.682,26.992 ccw(c159.766,28.076) QE4.1@159.766,26.543 ; 158.8,26.874 cw(c158.063,26.137) QE4.1@159.106,26.137
NetQE5_1: QE5.1 R5.2 | length 20.3
  Top Layer w0.254: R5.2@151.257,36.83 cw(c152.79,36.83) 151.706,37.914 ; 151.272,37.48 ccw(c151.923,36.83) R5.2@151.003,36.83 151.003,37.211 v1(152.019,38.227) ; v1@151.796,38.227 cw(c151.258,38.227) 151.638,37.846 cw(c152.019,37.466) v1@152.019,38.004
  Bottom Layer w0.254: v1@152.019,38.004 cw(c152.019,37.466) 152.4,37.846 cw(c152.78,38.227) v1@152.242,38.227 ; v1(152.019,38.227) 152.667,37.579 152.667,35.674 155.702,32.639 158.369,32.639 QE5.1@159.766,31.242 ; 158.483,32.525 ccw(c159.481,33.523) QE5.1@159.675,32.125 ; 158.8,32.208 cw(c158.063,31.471) QE5.1@159.106,31.471 ; 158.844,32.164 ccw(c159.569,32.889) QE5.1@159.71,31.873
NetQE6_1: QE6.1 R6.2 | length 20.2
  Top Layer w0.254: R6.2@151.257,40.894 cw(c152.79,40.894) 151.706,41.978 ; 151.272,41.544 ccw(c151.923,40.894) R6.2@151.003,40.894 151.003,41.275 v1(152.019,42.291) ; v1@151.796,42.291 cw(c151.258,42.291) 151.638,41.91 cw(c152.019,41.53) v1@152.019,42.068
  Bottom Layer w0.254: v1@151.861,42.133 cw(c151.481,41.753) 152.019,41.753 cw(c152.557,41.753) v1@152.177,42.133 ; v1(152.019,42.291) 152.019,40.767 153.67,39.116 157.226,39.116 QE6.1@159.766,36.576 ; 158.248,38.094 ccw(c159.766,39.611) QE6.1@159.766,37.465 ; 158.682,37.66 ccw(c159.766,38.744) QE6.1@159.766,37.211 ; 158.8,37.542 cw(c158.063,36.805) QE6.1@159.106,36.805
NetQE7_1: QE7.1 R7.2 | length 18.2
  Top Layer w0.254: R7.2@151.003,44.704 152.4,46.101 v1(152.4,46.355) ; R7.2@151.003,44.958 ccw(c151.003,45.571) 151.437,45.138 ccw(c151.87,44.704) R7.2@151.257,44.704 ; 151.84,45.541 ccw(c151.025,46.355) v1@152.177,46.355 ; 152.273,45.974 ccw(c151.893,46.355) v1@152.431,46.355
  Bottom Layer w0.254: v1@152.242,46.197 cw(c151.862,45.817) 152.4,45.817 cw(c152.938,45.817) v1@152.558,46.197 ; v1(152.4,46.355) 152.4,44.171 153.518,43.053 158.623,43.053 QE7.1@159.766,41.91 ; 158.737,42.939 ccw(c159.28,43.482) QE7.1@159.541,42.76 ; 158.8,42.876 cw(c158.063,42.139) QE7.1@159.106,42.139 ; QE7.1@159.02,42.656 ccw(c159.43,43.067) QE7.1@159.628,42.521
NetQE8_1: QE8.1 R8.2 | length 19.9
  Top Layer w0.254: R8.2@150.823,48.694 ccw(c150.39,49.127) 151.003,49.127 ccw(c151.616,49.127) R8.2@151.183,48.694 ; R8.2@151.003,48.514 151.003,50.165 v1(151.511,50.673) ; v1@151.288,50.673 cw(c150.75,50.673) 151.13,50.292 cw(c151.511,49.912) v1@151.511,50.45
  Bottom Layer w0.254: v1@151.511,50.45 cw(c151.511,49.912) 151.892,50.292 cw(c152.272,50.673) v1@151.734,50.673 ; v1(151.511,50.673) 152.654,49.53 152.654,47.498 152.908,47.244 QE8.1@159.766,47.244 ; QE8.1@159.299,46.777 ccw(c158.172,45.65) 158.172,47.244 ccw(c158.172,48.838) QE8.1@159.299,47.711 ; QE8.1@159.479,46.957 ccw(c158.785,46.263) 158.785,47.244 ccw(c158.785,48.225) QE8.1@159.479,47.531
NetQE9_1: QE9.1 R9.2 | length 19.5
  Top Layer w0.254: R9.2@150.868,55.95 ccw(c150.596,56.286) 151.028,56.286 ; R9.2@151.028,55.753 151.028,56.286 ; R9.2@151.188,55.95 cw(c151.461,56.286) 151.028,56.286 ; v1@151.796,57.277 cw(c151.258,57.277) 151.638,56.896 cw(c152.019,56.516) v1@152.019,57.054 ; v1(152.019,57.277) 151.028,56.286
  Bottom Layer w0.254: v1@151.861,57.119 cw(c151.481,56.739) 152.019,56.739 cw(c152.557,56.739) v1@152.177,57.119 ; v1(152.019,57.277) 152.019,54.991 154.432,52.578 QE9.1@159.766,52.578 ; QE9.1@159.299,52.111 ccw(c158.172,50.984) 158.172,52.578 ccw(c158.172,54.172) QE9.1@159.299,53.045 ; QE9.1@159.479,52.291 ccw(c158.785,51.597) 158.785,52.578 ccw(c158.785,53.559) QE9.1@159.479,52.865
NetQE10_1: QE10.1 R10.2 | length 17.1
  Top Layer w0.254: R10.2@151.028,59.563 152.021,60.556 152.021,60.958 v1(152.019,60.96) ; R10.2@151.028,59.817 ccw(c151.028,60.43) 151.462,59.997 ccw(c151.895,59.563) R10.2@151.282,59.563 ; R10.2@151.351,59.886 ccw(c150.277,60.96) v1@151.796,60.96 ; 151.785,60.319 ccw(c151.144,60.96) v1@152.05,60.96
  Bottom Layer w0.254: v1(152.019,60.96) 152.781,61.722 157.258,61.722 159.766,59.214 ; v1@152.019,61.183 ccw(c152.019,61.721) 152.4,61.341 ccw(c152.78,60.96) v1@152.242,60.96 ; QE10.1@159.468,58.73 ccw(c159.224,59.214) 159.766,59.214 ; QE10.1@159.766,57.912 159.766,59.214 ; QE10.1@160.064,58.73 cw(c160.308,59.214) 159.766,59.214
NetQE11_1: QE11.1 R11.2 | length 17.4
  Top Layer w0.254: R11.2@151.028,63.373 152.021,64.366 v1(152.021,64.493) ; R11.2@151.028,63.627 ccw(c151.028,64.24) 151.462,63.807 ccw(c151.895,63.373) R11.2@151.282,63.373 ; 151.551,63.896 ccw(c150.953,64.493) v1@151.798,64.493
  Bottom Layer w0.254: v1(152.021,64.493) 153.187,65.659 157.607,65.659 159.766,63.5 QE11.1@159.766,63.246 ; v1@152.021,64.716 ccw(c152.021,65.254) 152.402,64.874 ccw(c152.783,64.493) v1@152.244,64.493 ; 158.621,64.645 cw(c157.45,63.475) QE11.1@159.106,63.475 ; 158.682,64.584 ccw(c159.766,65.668) QE11.1@159.766,64.135 ; QE11.1@159.054,64.212 cw(c158.317,63.475) QE11.1@159.36,63.475 ; QE11.1@159.116,64.15 ccw(c159.766,64.801) QE11.1@159.766,63.881
NetQE12_1: QE12.1 R12.2 | length 18.4
  Top Layer w0.254: R12.2@150.849,67.363 ccw(c150.415,67.796) 151.028,67.796 ccw(c151.641,67.796) R12.2@151.208,67.363 ; R12.2@151.028,67.183 151.028,69.112 v1(151.518,69.603) ; v1@151.295,69.603 cw(c150.757,69.603) 151.138,69.222 cw(c151.518,68.841) v1@151.518,69.38
  Bottom Layer w0.254: v1(151.518,69.603) 152.401,70.485 157.861,70.485 QE12.1@159.766,68.58 ; v1@151.518,69.826 ccw(c151.518,70.364) 151.899,69.983 ccw(c152.28,69.603) v1@151.741,69.603 ; 158.248,70.098 ccw(c159.766,71.615) QE12.1@159.766,69.469 ; 158.682,69.664 ccw(c159.766,70.748) QE12.1@159.766,69.215 ; 158.8,69.546 cw(c158.063,68.809) QE12.1@159.106,68.809
NetQE13_1: QE13.1 R13.2 | length 16.4
  Top Layer w0.254: R13.2@151.028,74.549 152.021,75.542 v1(152.021,75.923) ; R13.2@151.028,74.803 ccw(c151.028,75.416) 151.462,74.983 ccw(c151.895,74.549) R13.2@151.282,74.549 ; R13.2@151.371,74.892 ccw(c150.34,75.923) v1@151.798,75.923 ; 151.805,75.326 ccw(c151.207,75.923) v1@152.052,75.923
  Bottom Layer w0.254: v1(152.021,75.923) 152.679,76.581 158.369,76.581 159.766,75.184 ; v1@152.021,76.146 ccw(c152.021,76.684) 152.402,76.304 ccw(c152.783,75.923) v1@152.244,75.923 ; QE13.1@159.484,74.74 ccw(c159.275,75.184) 159.766,75.184 ; QE13.1@159.766,73.914 159.766,75.184 ; QE13.1@160.048,74.74 cw(c160.257,75.184) 159.766,75.184
NetQE14_1: QE14.1 R14.2 | length 16
  Top Layer w0.254: R14.2@151.028,78.359 151.663,78.359 151.917,78.613 151.917,79.629 v1(152.021,79.733) ; R14.2@151.208,78.179 cw(c151.641,77.746) 151.641,78.359 cw(c151.641,78.972) R14.2@151.208,78.539 ; 151.917,78.944 cw(c152.811,78.944) v1@152.179,79.575
  Bottom Layer w0.254: v1(152.021,79.733) 152.806,80.518 158.496,80.518 QE14.1@159.766,79.248 ; v1@152.021,79.956 ccw(c152.021,80.494) 152.402,80.114 ccw(c152.783,79.733) v1@152.244,79.733 ; 158.61,80.404 ccw(c159.367,81.16) QE14.1@159.614,80.119 ; 158.8,80.214 cw(c158.063,79.477) QE14.1@159.106,79.477 ; 158.932,80.082 ccw(c159.49,80.64) QE14.1@159.672,79.872
NetQE15_1: QE15.1 R15.2 | length 17.2
  Top Layer w0.254: 151.226,82.646 ccw(c151.702,82.169) R15.2@151.028,82.169 151.028,82.448 v1(152.273,83.693) ; R15.2@151.282,82.169 cw(c152.569,82.169) 151.659,83.079 ; v1@152.05,83.693 cw(c151.512,83.693) 151.892,83.312 cw(c152.273,82.932) v1@152.273,83.47
  Bottom Layer w0.254: v1(152.273,83.693) 152.908,84.328 159.512,84.328 QE15.1@159.766,84.582 ; v1@152.273,83.916 ccw(c152.273,84.454) 152.654,84.074 ccw(c153.034,83.693) v1@152.496,83.693 ; 158.11,84.328 ccw(c158.11,86.009) QE15.1@159.299,84.82 ; 158.233,84.328 cw(c158.233,82.82) QE15.1@159.299,83.886 ; 158.724,84.328 ccw(c158.724,85.396) QE15.1@159.479,84.641 ; 158.846,84.328 cw(c158.846,83.434) QE15.1@159.479,84.066
NetQE16_1: QE16.1 R16.2 | length 17.8
  Top Layer w0.254: R16.2@150.849,86.159 ccw(c150.415,86.592) 151.028,86.592 ccw(c151.641,86.592) R16.2@151.208,86.159 ; R16.2@151.028,85.979 151.028,87.274 v1(151.511,87.757) ; v1@151.288,87.757 cw(c150.75,87.757) 151.13,87.376 cw(c151.511,86.996) v1@151.511,87.534
  Bottom Layer w0.254: v1(151.511,87.757) 153.67,89.916 QE16.1@159.766,89.916 ; v1@151.511,87.98 ccw(c151.511,88.518) 151.892,88.138 ccw(c152.272,87.757) v1@151.734,87.757 ; QE16.1@159.299,89.449 ccw(c158.172,88.322) 158.172,89.916 ccw(c158.172,91.51) QE16.1@159.299,90.383 ; QE16.1@159.479,89.629 ccw(c158.785,88.935) 158.785,89.916 ccw(c158.785,90.897) QE16.1@159.479,90.203
NetR35_2: R35.2 U4.1 | length 8.5
  Top Layer w0.254: v1(28.575,65.405) 28.575,65.276 U4.1@31.083,62.768 ; v1@28.798,65.405 ccw(c29.648,65.405) 29.047,64.804 ; 29.934,63.917 cw(c28.785,62.768) U4.1@30.41,62.768 ; 30.368,63.483 cw(c29.652,62.768) U4.1@30.664,62.768 ; 30.801,63.05 cw(c30.52,62.768) U4.1@30.918,62.768
  Bottom Layer w0.254: R35.2@28.321,65.702 ccw(c28.661,65.702) v1@28.566,65.375 ; v1(28.575,65.405) 28.321,65.659 R35.2@28.321,66.04 ccw(c28.759,66.04) v1@28.637,65.619
NetR36_2: R36.2 U4.21 | length 18.8
  Top Layer w0.254: U4.21@36.433,55.918 36.433,53.61 38.989,51.054 R36.2@38.989,39.116 ; R36.2@38.809,39.296 ccw(c38.376,39.729) 38.989,39.729 ccw(c39.602,39.729) R36.2@39.169,39.296
NetR37_2: R37.2 U4.20 | length 18
  Top Layer w0.254: U4.20@35.933,55.918 35.941,55.91 35.941,53.34 36.449,52.832 R37.2@36.449,39.116 ; R37.2@36.269,39.296 ccw(c35.836,39.729) 36.449,39.729 ccw(c37.062,39.729) R37.2@36.629,39.296
NetR40_1: R40.1 U4.38 | length 54.5
  Top Layer w0.254: U4.38@37.433,64.118 37.433,65.373 39.878,67.818 41.656,67.818 43.434,69.596 43.434,71.247 42.418,72.263 v1(40.64,72.263) ; v1@40.798,72.105 cw(c41.178,71.725) 41.178,72.263 cw(c41.178,72.801) v1@40.798,72.421
  Bottom Layer w0.254: R40.1@10.414,59.944 13.208,59.944 14.732,61.468 14.732,65.913 21.082,72.263 v1(40.64,72.263) ; R40.1@10.594,59.764 cw(c11.027,59.331) 11.027,59.944 cw(c11.027,60.557) R40.1@10.594,60.124 ; v1@40.482,72.105 ccw(c40.102,71.725) 40.102,72.263 ccw(c40.102,72.801) v1@40.482,72.421
NetR41_1: R41.1 U4.39 | length 52.6
  Top Layer w0.254: U4.39@36.933,64.118 36.933,65.762 39.624,68.453 41.395,68.453 42.418,69.476 v1(42.418,70.993) ; v1@42.26,70.835 cw(c41.88,70.455) 42.418,70.455 cw(c42.956,70.455) v1@42.576,70.835
  Bottom Layer w0.254: R41.1@10.414,62.484 12.446,62.484 13.843,63.881 13.843,66.294 21.082,73.533 41.148,73.533 42.418,72.263 v1(42.418,70.993) ; R41.1@10.594,62.304 cw(c11.027,61.871) 11.027,62.484 cw(c11.027,63.097) R41.1@10.594,62.664 ; v1@42.26,71.151 ccw(c41.88,71.531) 42.418,71.531 ccw(c42.956,71.531) v1@42.576,71.151

## Text inside footprints (layer, text, board x,y; h text height)
P6: Top Overlay "60" at 31.242,77.724 h1.27; Top Overlay "59" at 34.29,83.312 h1.27; Top Overlay "1" at 108.966,83.82 h1.27; Top Overlay "2" at 108.712,75.438 h1.27; Bottom Overlay "1" at 108.966,83.82 h1.27
P7: Top Overlay "60" at 34.29,15.748 h1.27; Top Overlay "59" at 34.544,23.114 h1.27; Top Overlay "1" at 108.966,23.114 h1.27; Top Overlay "2" at 108.712,15.748 h1.27; Bottom Overlay "1" at 108.966,23.114 h1.27
U6: Top Overlay "1" at 114.883,11.836 h1.27 r270